# Altium PCB FAT93.PcbDoc
Units mm, origin at the board's own origin, x right, y up, seen from the top; angles counter-clockwise.
Board outline 101.7 x 151.3 mm, 2 copper layers (Top Layer, Bottom Layer); 13 components, 10 nets, 54 pads, 0 vias.
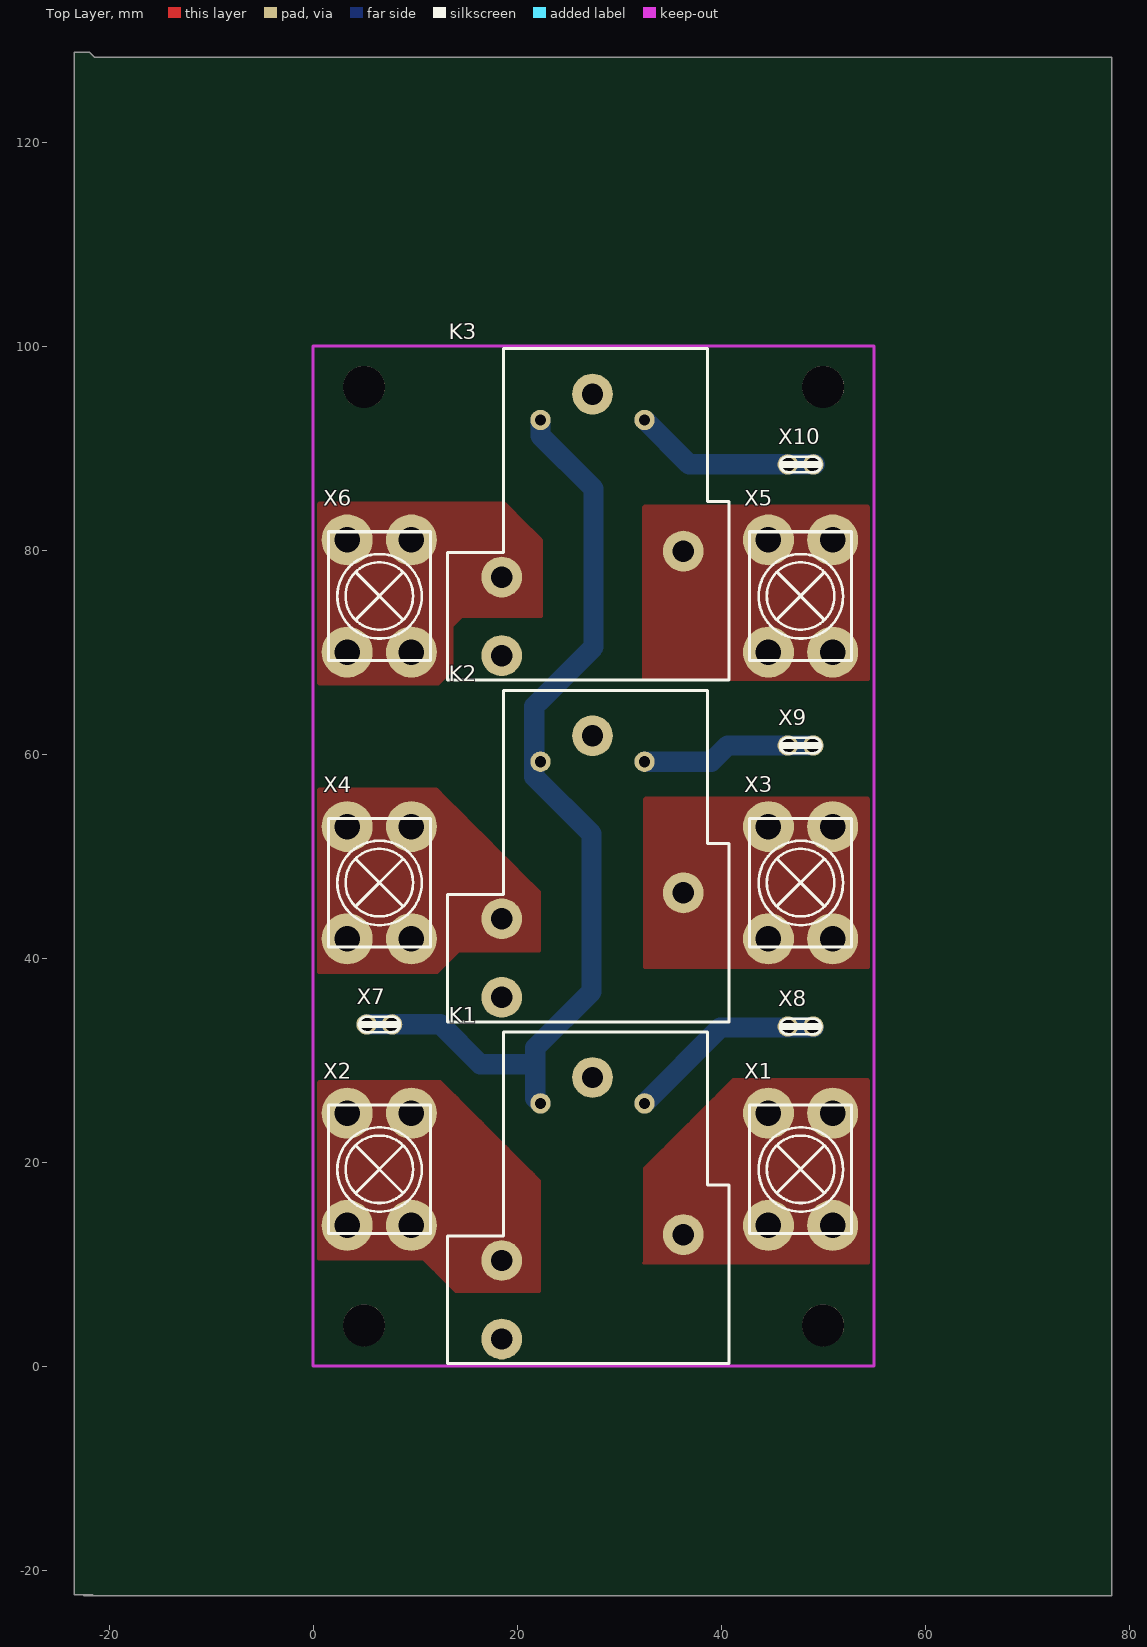
[diagram p0: Top Layer view]
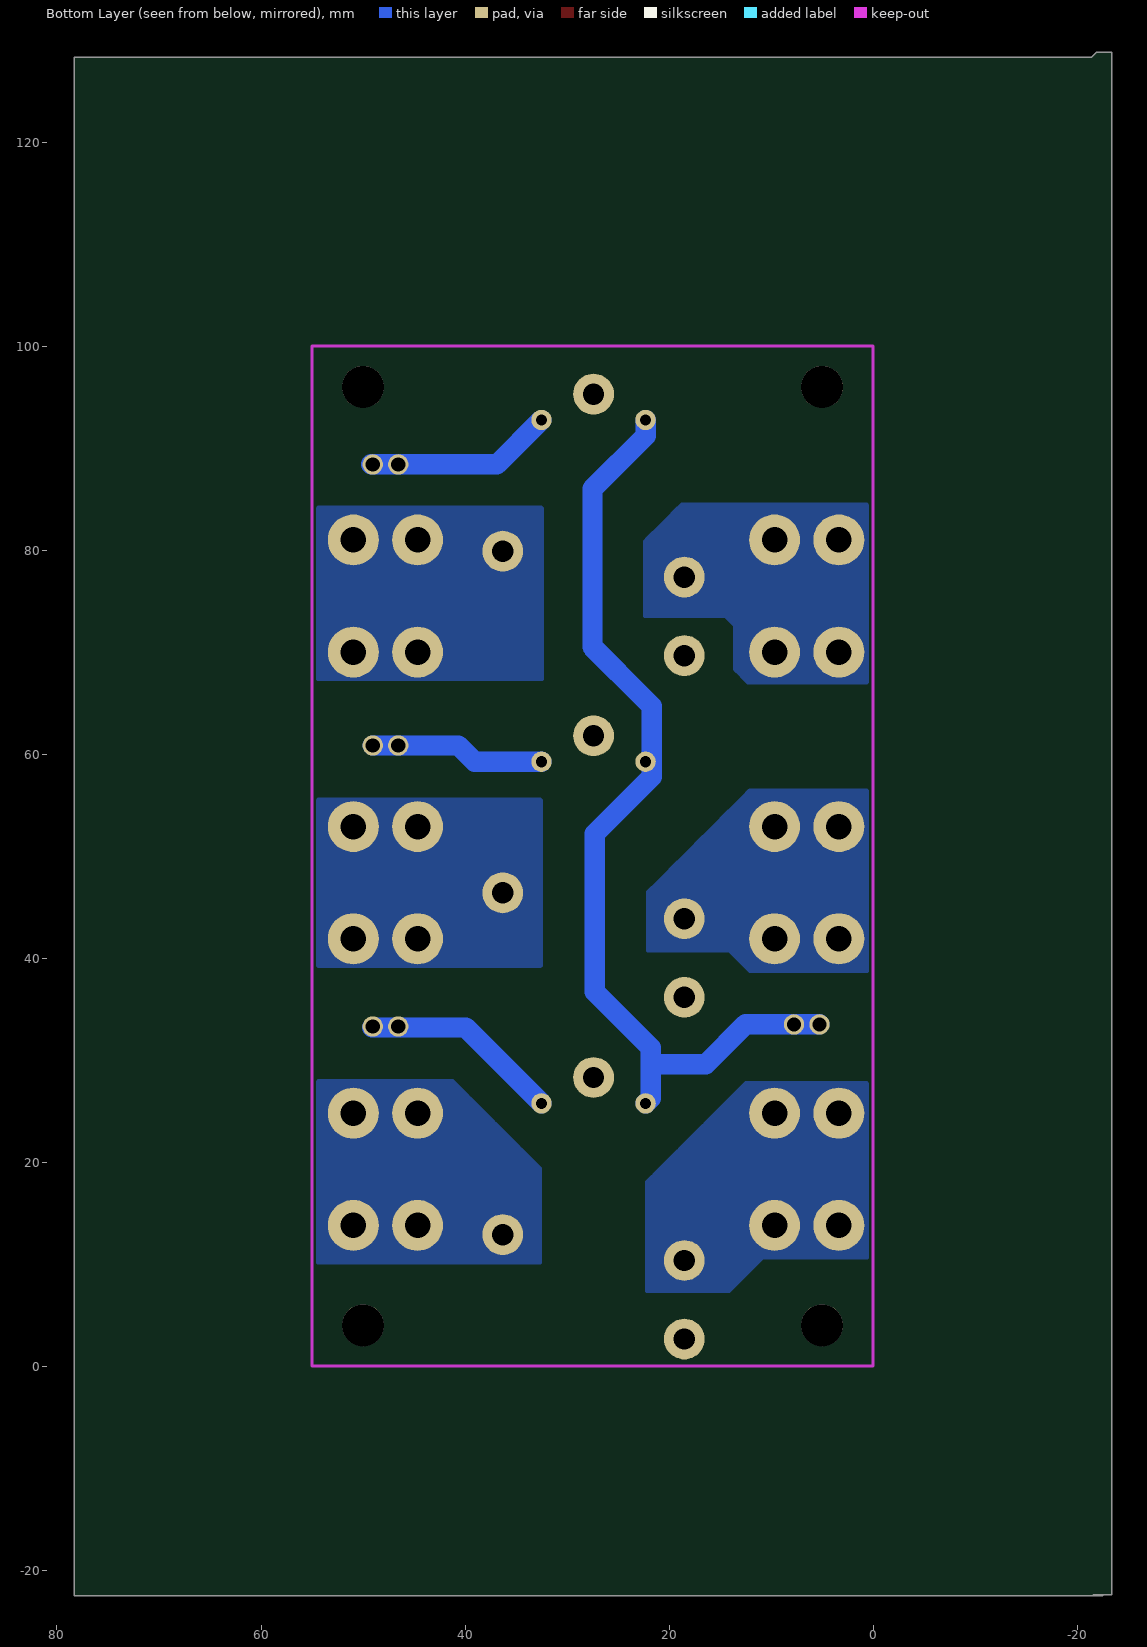
[diagram p1: Bottom Layer view, seen from below]

## Layer stack, top to bottom
Top Layer: signal copper 0.0356
Dielectric: dielectric 0.32, FR-4, Dk 4.8
Bottom Layer: signal copper 0.0356

## Board outline
-22.5,-22.5 78.3,-22.5 78.3,128.3 -21.4,128.3 -21.9,128.8 -23.4,128.8 -23.4,-22.4 -21.6,-22.4

## Design rules (kind name [scope] priority, off if disabled: settings)
Clearance [All] p1: gap=0.254
ComponentClearance [All] p1: gap=0.254 collisioncheckmode=0
PolygonConnect [All] p1: connectstyle=Direct reliefconductorwidth=0.254 reliefentries=4 polygonreliefangle="90 Angle"
RoutingLayers [All] p1: top layer=Horizontal bottom layer=Vertical
RoutingVias [All] p1: holewidth=0.711 width=1.27 viastyle="Through Hole" minholewidth=0.711 minwidth=1.27 maxholewidth=0.711 maxwidth=1.27
SolderMaskExpansion [All] p1: expansion=0.102
TestPointUsage [All] p1: valid=0 allowmultiple=FALSE
Testpoint [All] p1: side=15 testpointundercomponent=TRUE minsize=1.016 maxsize=2.54 preferedsize=1.524 minholesize=0 maxholesize=1.016 preferedholesize=0.813 testpointgrid=0.025 style=1023 order=-539222988
Width [All] p1: maxlimit=3 minlimit=0.254 preferedwidth=0.254 toplayer_prefwidth=1 bottomlayer_prefwidth=2 minimp=50.000000 maximp=50.000000 favimp=50.000000
16 further rules are at their usual default settings.

## Components (designator, comment, footprint, x,y, rotation, side; value= is the part's Value field where it differs from the comment)
K1 "NT90" NT90 17.3,28.2 r90 top
K2 "NT90" NT90 17.3,61.7 r90 top
K3 "NT90" NT90 17.3,95.2 r90 top
X1 "Socket" k13-4-9 47.8,19.3 r90 top
X2 "Socket" k13-4-9 6.5,19.3 r90 top
X3 "Socket" k13-4-9 47.8,47.4 r90 top
X4 "Socket" k13-4-9 6.5,47.4 r90 top
X5 "Socket" k13-4-9 47.8,75.5 r90 top
X6 "Socket" k13-4-9 6.5,75.5 r90 top
X7 "Socket" DJ614-2.8 6.5,33.5 r180 top
X8 "Socket" DJ614-2.8 47.8,33.3 r0 top
X9 "Socket" DJ614-2.8 47.8,60.85 r0 top
X10 "Socket" DJ614-2.8 47.8,88.4 r0 top

## Footprints (in the part's own frame and the unit in brackets; to place one, negate y for a bottom-side part, rotate by r counter-clockwise, add the part's x,y. Pads: shape width x height; smd on the part's side, far side on the other; paste and mask are expansions set on the pad)
DJ614-2.8 [mm]
  round 2 hole 1.4: 1(-1.25,0) 1(1.25,0)
  silkscreen extent -2,-0.75 2,0.75
k13-4-9 [mm]
  round 5 hole 2.5: 1(-5.5,-3.15) 1(-5.5,3.15) 1(5.5,-3.15) 1(5.5,3.15)
  silkscreen extent -6.3,-5 6.3,5
NT90 [mm]
  round 4 hole 2.1: 1(-15.3,-19) 2(-25.54,-1.2) 3(-17.84,-1.2) 6(0.1,-10.1)
  round 2 hole 1.1: 4(-2.44,-5) 5(-2.44,-15.2)
  silkscreen extent -27.95,-23.48 4.55,4.13

## Part data
K1 K2 K3: "Single-Pole Dual-Throw Relay"

## Free pads (board coordinates)
  round 4.1 hole 4.1: 7(5,4) 8(50,4) 9(5,96) 10(50,96)

## Nets (pads, with @x,y where several pads share a name; then routed paths per layer and width w, separated by ;. In a path a pad name is that pad's centre, name@x,y a point inside that pad or via, vN(x,y) a via of type N, cw(c..) or ccw(c..) an arc to the next point about the centre after c; other vN are vias at no path point)
NetK1_1: K1.1 X1.1
NetK1_3: K1.3 X2.1
NetK1_4: K1.4 K2.4 K3.4 X7.1 | length 94.5
  Bottom Layer w2: X7.1@5.25,33.5 12.5,33.5 16.4,29.6 21.8,29.6 ; K1.4 21.8,26.26 21.8,31.2 27.3,36.7 27.3,52.2 21.7,57.8 21.7,64.7 22.4,65.4 27.5,70.5 27.5,86 22.3,91.2 K3.4
NetK1_5: K1.5 X8.1 | length 19.7
  Bottom Layer w2: K1.5 39.94,33.2 X8.1@49.1,33.2
NetK2_1: K2.1 X3.1
NetK2_3: K2.3 X4.1
NetK2_5: K2.5 X9.1 | length 17.2
  Bottom Layer w2: K2.5 39.06,59.26 40.65,60.85 X9.1@49.05,60.85
NetK3_1: K3.1 X5.1
NetK3_3: K3.3 X6.1
NetK3_5: K3.5 X10.1 | length 18.5
  Bottom Layer w2: K3.5 36.86,88.4 X10.1@49.2,88.4
pads on no net: K1.2 K1.6 K2.2 K2.6 K3.2 K3.6

## Polygon pours and split planes (outlines as drawn)
NetK2_3 on Top Layer (hatched 90Degree grid 0.1 track 0.3, remove dead copper): -1.3,56.6 12.1,56.6 22.2,46.5 22.2,40.7 14.3,40.7 12.2,38.6 -1.5,38.6 -1.5,56.6
NetK1_3 on Top Layer (hatched 90Degree grid 0.1 track 0.3, remove dead copper): -2.6,27.9 12.5,27.9 22.2,18.2 22.2,7.3 14,7.3 10.8,10.5 -2.6,10.5
NetK3_3 on Top Layer (hatched 90Degree grid 0.1 track 0.3, remove dead copper): -0.7,66.9 12.3,66.9 13.6,68.2 13.6,72.5 14.6,73.5 22.4,73.5 22.4,81 18.8,84.6 -1.7,84.6 -1.7,66.9
NetK3_1 on Top Layer (hatched 90Degree grid 0.1 track 0.3, remove dead copper): 58.3,84.3 32.4,84.3 32.4,67.3 57.4,67.3 57.4,84.5 58.2,84.5
NetK2_1 on Top Layer (hatched 90Degree grid 0.1 track 0.3, remove dead copper): 57.9,55.7 32.5,55.7 32.5,39.1 57.7,39.1 57.7,55.8
NetK1_1 on Top Layer (hatched 90Degree grid 0.1 track 0.3, remove dead copper): 32.4,10.1 57.4,10.1 57.4,28.1 41.2,28.1 36.3,23.2 32.5,19.4 32.5,10.2
NetK1_1 on Bottom Layer (hatched 90Degree grid 0.1 track 0.3, remove dead copper): 56.4,28 41.2,28 32.6,19.4 32.6,10.1 57.8,10.1 57.8,28.1 56.2,28.1
NetK2_1 on Bottom Layer (hatched 90Degree grid 0.1 track 0.3, remove dead copper): 55.6,55.6 32.5,55.6 32.5,39.2 57,39.2 57,55.6
NetK3_1 on Bottom Layer (hatched 90Degree grid 0.1 track 0.3, remove dead copper): 55.9,84.2 32.4,84.2 32.4,67.3 56.9,67.3 56.9,84.2
NetK1_3 on Bottom Layer (hatched 90Degree grid 0.1 track 0.3, remove dead copper): -0.8,27.8 12.5,27.8 22.2,18.1 22.2,7.3 14.1,7.3 10.8,10.6 -1.3,10.6 -1.3,27.8 -0.3,27.8 -0.3,27.9
NetK2_3 on Bottom Layer (hatched 90Degree grid 0.1 track 0.3, remove dead copper): -0.7,38.7 12.1,38.7 14.1,40.7 22.1,40.7 22.1,46.5 12.1,56.5 -0.8,56.5 -0.8,38.7
NetK3_3 on Bottom Layer (hatched 90Degree grid 0.1 track 0.3, remove dead copper): -0.7,84.5 18.8,84.5 22.4,80.9 22.4,73.5 14.5,73.5 13.6,72.6 13.6,68.3 12.3,67 -1,67 -1,84.5

## Keep-outs
Keep-Out Layer:
  lines w0.3: 0,0 55,0 55,100 0,100 0,0

## Dimensions
0,100 to 0,0 on Mechanical 1
0,0 to 55,0 on Mechanical 1